# Allegro board olaftry2.brd
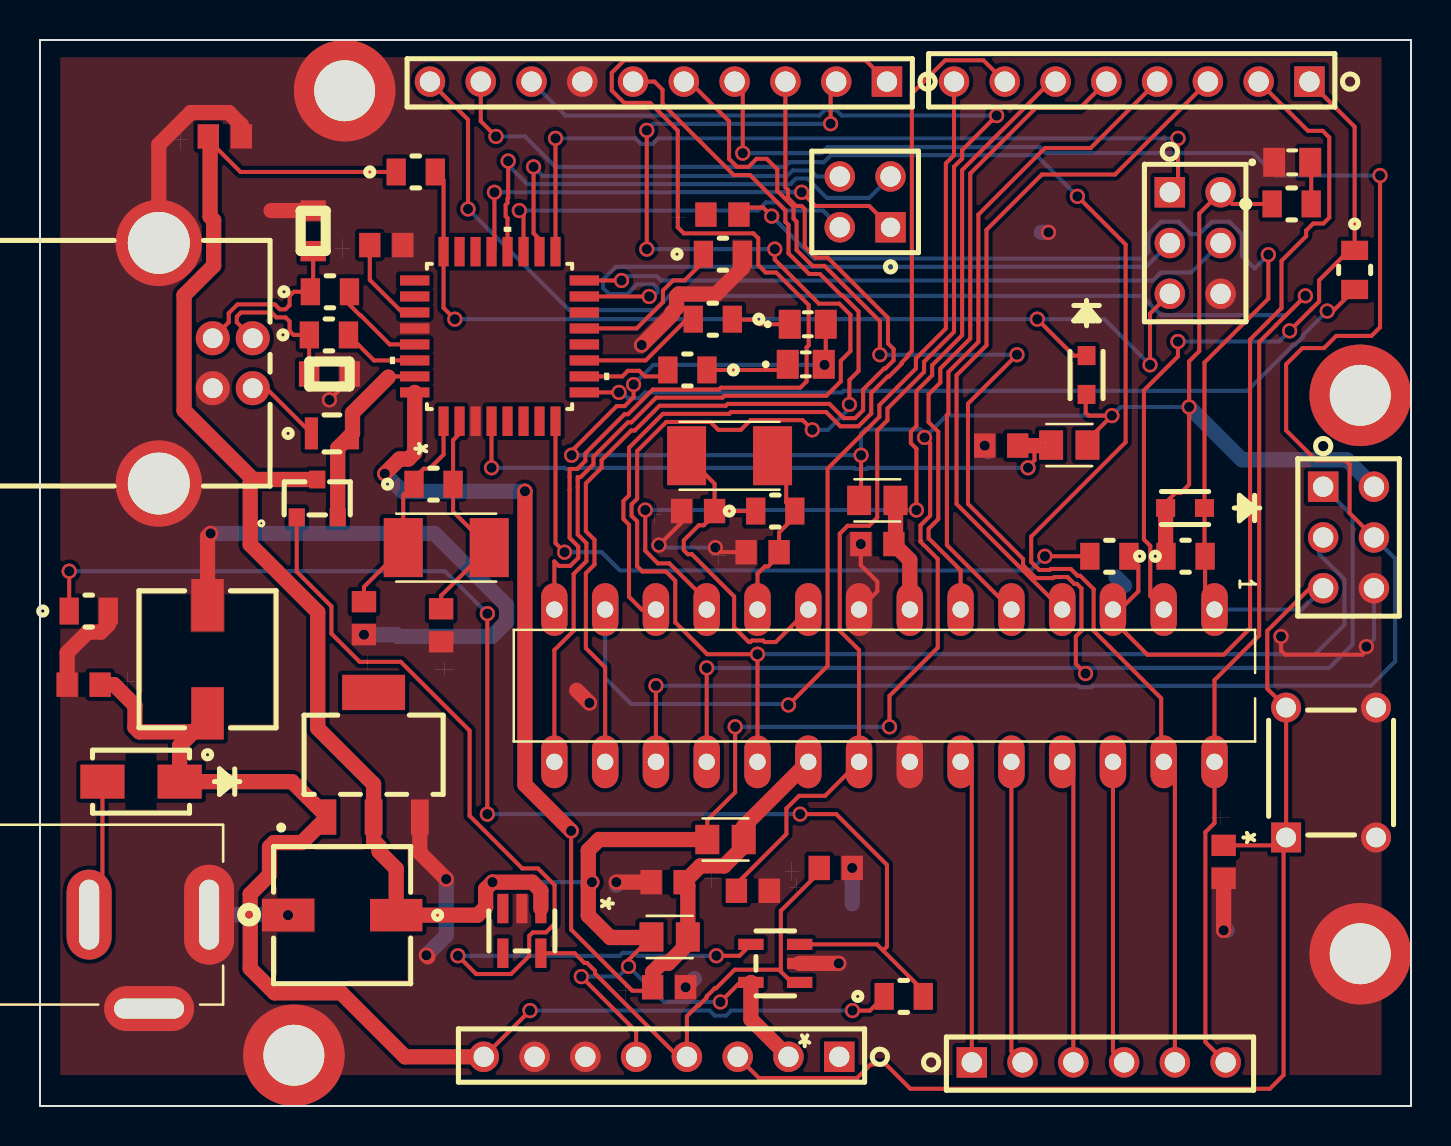
[diagram p0: board, top side]
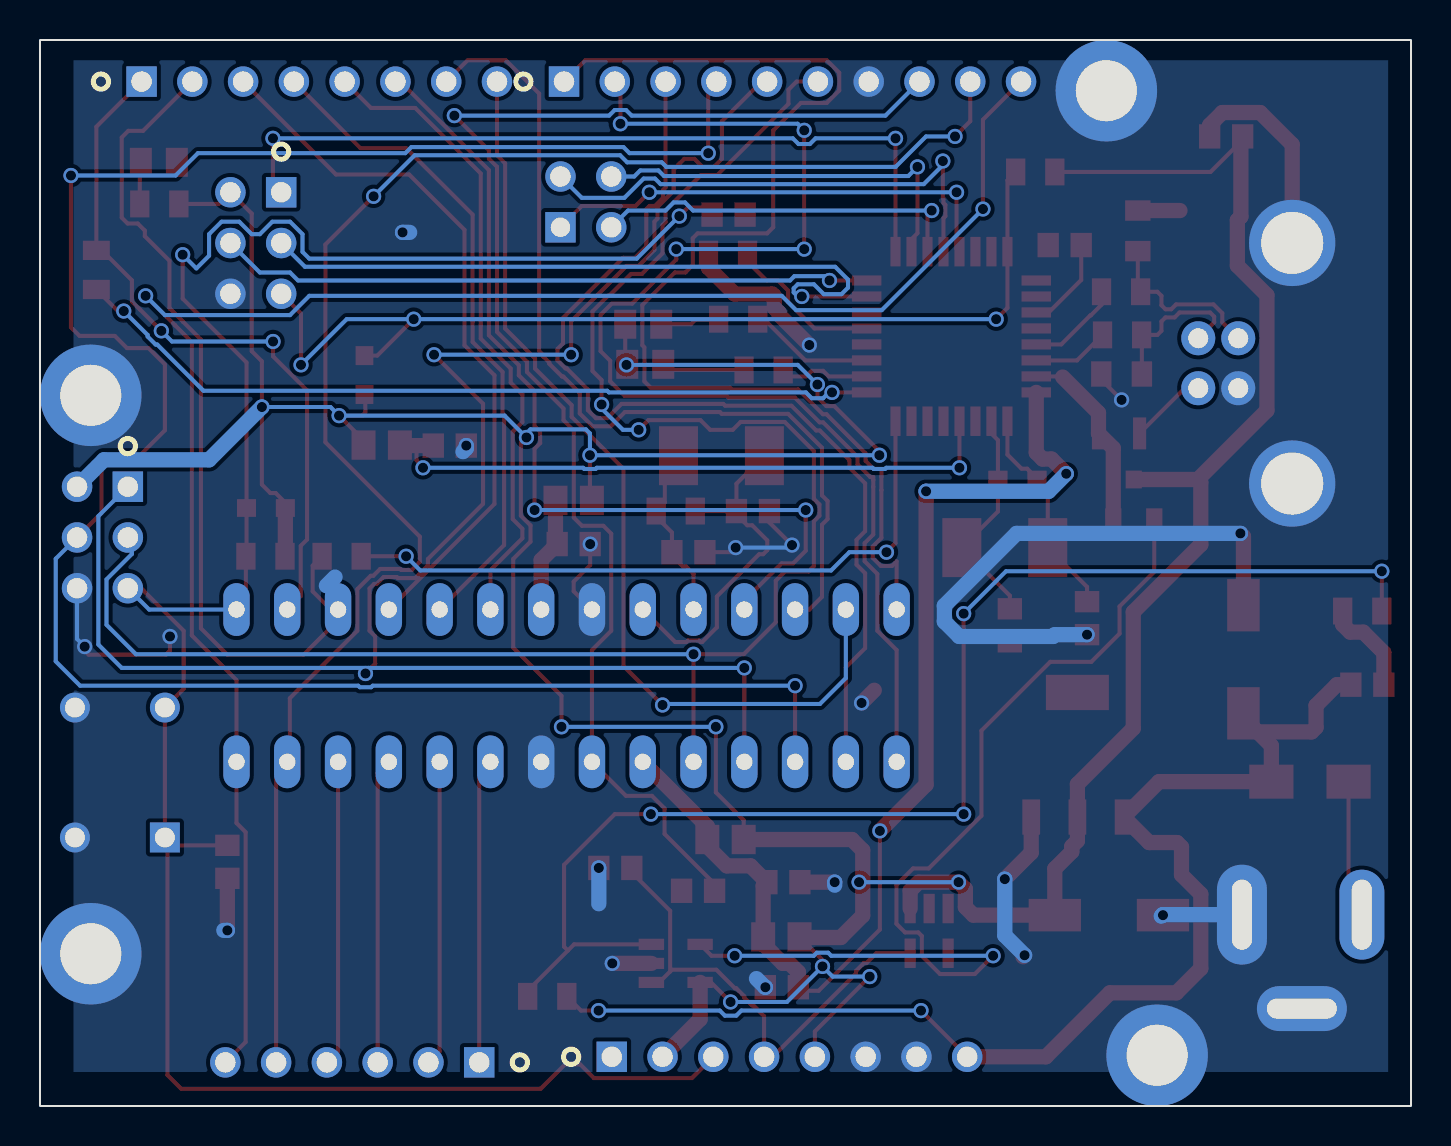
[diagram p1: board, bottom side, seen from below]

Outline 68.58 x 53.34 mm; copper layers: TOP, BOTTOM. Coordinates in mm from the lower left corner of the outline.
Outline path: rectangle 0,0 68.58,53.34

## Design rules (mm)
constraint set DEFAULT: min track width 0.203, pair gap 0.203
net group DP1: nets USB_D+ USB_D-
nets with their own width: min track width 0.762; nets 5V_AVCC 5V_VCC 5V_VCC1 +5V GND USBVCC VIN

## Placement (name value [footprint] x y rotation side)
C1  22pF  [CC0805N]  16.21 24.41 90 top
C2  22pF  [CC0805N]  20.07 24.05 90 top
C3  100nF  [CC0805N]  48.08 33.05 180 top
C4  100nF  [CC0805N]  34.14 44.6 0 top
C5  100nF  [CC0805N]  31.47 5.94 0 top
C6  100uF  [U2-K]  8.38 22.35 90 top
C7  100uF  [U2-K]  15.11 9.55 180 top
C8  100nF  [CC0805N]  9.25 48.51 0 top
C9  100nF  [CC0805N]  2.18 21.08 180 top
C10  1uF  [CC0805N]  17.32 43.08 0 top
C12  2.2uF  [CC0805N]  39.8 11.91 0 top
C13  100nF  [CC0805N]  59.21 12.22 270 top
C14  22pF  [CC0805N]  36.14 27.71 0 top
C15  22pF  [CC0805N]  32.92 29.77 0 top
C16  100nF  [CC0805N]  41.88 28.12 180 top
C17  100nF  [CC0805N]  31.39 11.2 180 top
C18  100nF  [CC0805N]  35.66 10.77 180 top
D1  DIODE SCHOTTKY  [SD0805]  52.35 36.58 270 top
D2  DIODE  [SMA]  5.05 16.23 180 top
D3  TxLED  [LED_0805_ORANGE]  38.4 39.12 0 top
D4  RxLED  [LED_0805_ORANGE]  38.3 37.11 0 top
D5  DIODE SCHOTTKY  [SD0805]  57.28 29.92 180 top
D6  PWR LED  [LEDC2012X70N]  62.64 47.22 0 top
J1  JUMPER  [HEADERV_4POS_2X2]  42.55 43.97 0 top
J2  POWER  [CONN8_FH]  39.98 2.46 0 top
J3  ICSP1  [HDRV6POS254_2X3]  56.52 45.72 270 top
J4  +12V DC  [CUI_PJ-002AH]  8.46 9.58 180 top
J5  USB_B  [CON4-B474X618RZT]  10.64 35.92 270 top
J6  3.3V LP2985  [DBV5]  24.1 8.76 270 top
J7  HEADER 10  [CONN10_FH]  42.37 51.26 0 top
J8  ICSP  [HDRV6POS254_2X3]  64.19 30.99 270 top
J9  HEADER 6  [CONN6_FH]  46.61 2.18 180 top
J10  HEADER 8  [CONN8_FH]  63.5 51.26 0 top
L1  BEAD  [BEADC2112X105N]  51.49 33.07 180 top
L2  BEAD  [BEADC2112X105N]  34.29 13.34 0 top
L3  2.2uH  [IND_2016]  14.61 33.66 0 top
L4  BEAD  [BEADC2112X105N]  41.88 30.3 0 top
L5  BEAD  [BEADC2112X105N]  31.5 8.46 0 top
MH1  M_HOLE  [MH_120]  12.7 2.54 0 top
MH2  M_HOLE  [MH_120]  66.04 7.62 0 top
MH3  M_HOLE  [MH_120]  15.24 50.8 0 top
MH4  M_HOLE  [MH_120]  66.04 35.56 0 top
Q1  MOSFET N  [SOT-23]  13.87 30.4 0 top
R1  10k  [STA_RMCF0805]  18.8 46.74 0 top
R2  1Meg  [STA_RMCF0805]  19.68 31.11 0 top
R3  1k  [STA_RMCF0805]  34.16 42.62 0 top
R4  22Ohm  [STA_RMCF0805]  14.45 38.58 0 top
R5  22Ohm  [STA_RMCF0805]  14.5 40.74 0 top
R6  1k  [STA_RMCF0805]  33.66 39.37 180 top
R7  1k  [STA_RMCF0805]  32.38 36.83 180 top
R8  1k  [STA_RMCF0805]  65.76 41.83 270 top
R9  1k  [STA_RMCF0805]  53.49 27.51 180 top
R10  10k  [STA_RMCF0805]  57.3 27.51 0 top
R11  1Meg  [STA_RMCF0805]  36.78 29.77 0 top
R12  10k  [STA_RMCF0805]  43.21 5.49 0 top
R13  10k  [STA_RMCF0805]  2.44 24.77 0 top
R14  1k  [STA_RMCF0805]  62.61 45.14 0 top
RV1  VARISTOR  [VARISTOR_0805]  14.48 36.63 0 top
RV2  VARISTOR  [VARISTOR_0805]  13.67 43.79 90 top
SW1  SW DPST  [SW4_1825910-B]  62.33 13.44 90 top
U1  ATMEGA16U2-MUR  [32A]  22.99 38.51 90 top
U2  LM7805/TO  [DCY4]  16.69 17.58 0 top
U3  ATMEGA328P-PN  [DIPDIL28]  58.75 24.84 270 top
U4  LM321/TO  [MF05A]  36.78 7.14 180 top
Y1  16 MHz  [XTAL500X320X130N]  20.32 27.94 180 top
Y2  16 MHz  [XTAL500X320X130N]  34.49 32.54 180 top

## Library data of the parts
C1 C2 C14 C15 = CAP NP: User Part Number: C0805C220K5GACTU; Tolerance: TOL
C3-C5 C8 C9 C13 C16-C18 = CAP NP: User Part Number: C0805C104K3RACTU; Tolerance: TOL
C6 C7 = CAP: User Part Number: EDH107M025A9HAA; Tolerance: TOL
C10 = CAP NP: User Part Number: C0805C105K3PACTU; Tolerance: TOL
C12 = CAP NP: User Part Number: C0805C225K4RACTU; Tolerance: TOL
D1 D5 = DIODE SCHOTTKY: User Part Number: SD0805S040S0R5; Tolerance: TOL
D2 = DIODE: User Part Number: PN; Tolerance: TOL
D3 D4 D6 = LED
J1 = HEADER 4_1: User Part Number: PN; Tolerance: TOL
J2 = HEADER 8
J3 J8 = HEADER 6_0: User Part Number: PN; Tolerance: TOL
J4 = CONN JACK PWR
J5 = HEADER 4_3
J6 = HEADER 5_2: User Part Number: PN; Tolerance: TOL
J7 = HEADER 10_0
J9 = HEADER 6_1
J10 = HEADER 8_0
L1 L2 L4 L5 = BEAD
L3 = INDUCTOR: User Part Number: PN; Tolerance: TOL
MH1-MH4 = M_HOLE
Q1 = MOSFET N_1: User Part Number: PN; Tolerance: TOL
R1 R3-R10 R12-R14 = RESISTOR: User Part Number: PN; Tolerance: TOL
R2 R11 = RESISTOR: User Part Number: RMCF0805JT1M00; Tolerance: TOL
RV1 RV2 = VARISTOR: User Part Number: PN; Tolerance: TOL
SW1 = SW DPST: User Part Number: PN; Tolerance: TOL
U1 = ATMEGA16U2-MUR_7: Tolerance: TOL
U2 = LM7805/TO_1: User Part Number: PN; Tolerance: TOL
U3 = ATMEGA328P-PN_4
U4 = LM321/TO_0: User Part Number: PN; Tolerance: TOL
Y1 Y2 = CRYSTAL

## Footprints (pads in the part's own frame, mm; a bottom-side part is the same pattern mirrored in y, then rotated)
32A
  rect 1.473x0.508 smd: 1(-4.242,2.8) 2(-4.242,2) 3(-4.242,1.2) 4(-4.242,0.4) 5(-4.242,-0.4) 6(-4.242,-1.2) 7(-4.242,-2) 8(-4.242,-2.8) 17(4.242,-2.8) 18(4.242,-2) 19(4.242,-1.2) 20(4.242,-0.4) 21(4.242,0.4) 22(4.242,1.2) 23(4.242,2) 24(4.242,2.8)
  rect 0.508x1.473 smd: 9(-2.8,-4.242) 10(-2,-4.242) 11(-1.2,-4.242) 12(-0.4,-4.242) 13(0.4,-4.242) 14(1.2,-4.242) 15(2,-4.242) 16(2.8,-4.242) 25(2.8,4.242) 26(2,4.242) 27(1.2,4.242) 28(0.4,4.242) 29(-0.4,4.242) 30(-1.2,4.242) 31(-2,4.242) 32(-2.8,4.242)
BEADC2112X105N
  rect 1.2x1.47 smd: 1(-0.91,0) 2(0.91,0)
CC0805N
  rect 1.067x1.219 smd: 1(-0.826,0) 2(0.826,0)
CON4-B474X618RZT
  round 1.702 hole 0.991: 1(0,0) 2(-2.5,0) 3(-2.5,-2) 4(0,-2)
  round 4.318 hole 3.099: 5(-7.27,-4.699) 6(4.77,-4.699)
CONN6_FH
  rect 1.524x1.524 hole 1.016: 1(0,0)
  round 1.524 hole 1.016: 2(-2.54,0) 3(-5.08,0) 4(-7.62,0) 5(-10.16,0) 6(-12.7,0)
CONN8_FH
  rect 1.524x1.524 hole 1.016: 1(0,0)
  round 1.524 hole 1.016: 2(-2.54,0) 3(-5.08,0) 4(-7.62,0) 5(-10.16,0) 6(-12.7,0) 7(-15.24,0) 8(-17.78,0)
CONN10_FH
  rect 1.524x1.524 hole 1.016: 1(0,0)
  round 1.524 hole 1.016: 2(-2.54,0) 3(-5.08,0) 4(-7.62,0) 5(-10.16,0) 6(-12.7,0) 7(-15.24,0) 8(-17.78,0) 9(-20.32,0) 10(-22.86,0)
CUI_PJ-002AH
  oval 2.5x5 hole 1x3.5: 1(0,0)
  oval 2.25x4.5 hole 1x3.5: 2(6,0)
  oval 4.5x2.25 hole 3.5x1: 3(3,4.7)
DBV5
  rect 1.473x0.559 smd: 1(-1.118,0.95) 2(-1.118,0) 3(-1.118,-0.95) 4(1.118,-0.95) 5(1.118,0.95)
DCY4
  rect 3.15x1.765 smd: (0,3.118)
  rect 0.889x1.765 smd: 1(-2.311,-3.118) 2(0,-3.118) 3(2.311,-3.118)
DIPDIL28
  oval 2.642x1.321 hole 0.813: 1(0,0) 2(0,-2.54) 3(0,-5.08) 4(0,-7.62) 5(0,-10.16) 6(0,-12.7) 7(0,-15.24) 8(0,-17.78) 9(0,-20.32) 10(0,-22.86) 11(0,-25.4) 12(0,-27.94) 13(0,-30.48) 14(0,-33.02) 15(7.62,-33.02) 16(7.62,-30.48) 17(7.62,-27.94) 18(7.62,-25.4) 19(7.62,-22.86) 20(7.62,-20.32) 21(7.62,-17.78) 22(7.62,-15.24) 23(7.62,-12.7) 24(7.62,-10.16) 25(7.62,-7.62) 26(7.62,-5.08) 27(7.62,-2.54) 28(7.62,0)
HDRV6POS254_2X3
  rect 1.524x1.524 hole 1.016: 1(0,0)
  round 1.524 hole 1.016: 2(0,2.54) 3(2.54,0) 4(2.54,2.54) 5(5.08,0) 6(5.08,2.54)
HEADERV_4POS_2X2
  rect 1.524x1.524 hole 0.965: 1(0,0)
  round 1.524 hole 1.016: 2(-2.54,0) 3(0,2.54) 4(-2.54,2.54)
IND_2016
  rect 0.656x1.6 smd: 1(-1.028,0) 2(1.028,0)
LED_0805_ORANGE
  rect 1.1x1.45 smd: 1(-0.9,0) 2(0.9,0)
LEDC2012X70N
  rect 1.1x1.45 smd: 1(-0.9,0) 2(0.9,0)
MF05A
  rect 1.27x0.559 smd: 1(-1.219,0.953) 2(-1.219,0) 3(-1.219,-0.953) 4(1.219,-0.953) 5(1.219,0.953)
MH_120
  round 5.08 hole 3.048: 1(0,0)
SD0805
  rect 0.953x0.889 smd: 1(-0.972,0) 2(0.972,0)
SMA
  rect 2.21x1.702 smd: 1(-1.93,0) 2(1.93,0)
SOT-23
  rect 0.813x0.889 smd: 1(-1.025,-0.945) 2(1.025,-0.945) 3(0,0.945)
STA_RMCF0805
  rect 0.965x1.346 smd: 1(-0.978,0) 2(0.978,0)
SW4_1825910-B
  rect 1.499x1.499 hole 0.991: 1(0,0)
  round 1.499 hole 0.991: 2(6.5,0) 3(0,-4.5) 4(6.5,-4.5)
U2-K
  rect 2.616x1.626 smd: 1(-2.705,0) 2(2.705,0)
VARISTOR_0805
  rect 1.02x1.27 smd: 1(-1.015,0) 2(1.015,0)
XTAL500X320X130N
  rect 1.95x2.95 smd: 1(-2.15,0) 2(2.15,0)

## Nets
5V_AVCC: C5.1 C17.1 L2.2 L5.2 U1.32 U3.20
5V_VCC: C16.1 L4.2 U3.7(VCC)
5V_VCC1: C3.1 L1.2 U1.4
+3.3V: C12.1 J2.4 J6.5(VOUT) U4.1
+5V: C7.1 C8.1 D1.2(CATHODE) D3.2 D4.2 D5.2(CATHODE) J2.2 J2.5 J3.2 J6.1 J8.2 L1.1 L2.1 L4.1 L5.1 Q1.3 R1.1 R10.1 R14.1 U2.2(VOUT) U4.5(VCC)
GND: C1.1 C2.1 C3.2 C5.2 C6.2 C7.2 C8.2 C9.2 C10.2 C12.2 C13.2 C14.1 C15.1 C16.2 C17.2 C18.1 D6.1(CATHODE) J2.6 J2.7 J3.6 J4.1 J4.3 J5.4 J5.5 J5.6 J6.2 J7.7 J8.6 R3.2 R13.2 RV1.2 RV2.2 SW1.3 SW1.4(NO2) U1.3 U1.28 U2.3 U3.8 U3.22 U4.2
VIN: C6.1 C9.1 D2.1(K) J2.8 R12.1 U2.1
AD0: J9.1 U3.23
AD1: J9.2 U3.24
AD2: J9.3 U3.25
AD3: J9.4 U3.26
AD4: J7.9 J9.5 U3.27
AD5: J7.10 J9.6 U3.28
AREF: C18.2 J7.8 U3.21
D0/RX: J10.1 R8.1 U3.2
D1/TX: J10.2 R9.1 U3.3
D2: J10.3 U3.4
D3: J10.4 U3.5
D4: J10.5 U3.6
D5: J10.6 U3.11
D6: J10.7 U3.12
D7: J10.8 U3.13
D8: J7.1 U3.14
D9: J7.2 U3.15
MISO: J7.5 J8.1 U3.18
MISO1: J3.1 U1.17
MOSI: J7.4 J8.4 U3.17
MOSI1: J3.4 U1.16
PB4: J1.4 U1.18
PB5: J1.2 U1.19
PB6: J1.3 U1.20
PB7: J1.1 U1.21
RESET: C4.2 C13.1 D5.1 J2.3 J8.5 R10.2 SW1.1 SW1.2 U3.1
RESET1: D1.1 J3.5 R1.2 U1.24
SCK: J7.6 J8.3 U3.19
SCK1: J3.3 U1.15
SS: J7.3 U3.16
SS1: U1.14
USB_D+: J5.3 R5.1 RV2.1
USB_D-: J5.2 R4.1 RV1.1
USBVCC: L3.2 Q1.2(SOURCE) U1.31
X1_1: C1.2 R2.1 U1.1(XTAL1) Y1.2
X1_2: C2.2 R2.2 U1.2 Y1.1
N05673: R5.2 U1.29
N05679: R4.2 U1.30
N06312: C10.1 U1.27
N08810: C15.2 R11.1 U3.9 Y2.2
N08902: C14.2 R11.2 U3.10 Y2.1
N09327: R6.2 U1.11
N09393: R7.2 U1.10
N09409: D3.1(CATHODE) R6.1
N09411: D4.1(CATHODE) R7.1
N09469: R8.2 U1.9
N09481: R9.2 U1.8
N12906: C4.1 R3.1 U1.13
N15968: D2.2 J4.2
N19205: J6.3
N20833: Q1.1 U4.4
N21024: R12.2 R13.1 U4.3
N21846: D6.2 R14.2
N47345: J5.1(VCC) L3.1

Pads without a net: J2 1; J6 4; MH1 1; MH2 1; MH3 1; MH4 1; U1 5 6 7 12 22 23 25 26

## Via types
v1: diameter 0.762, hole 0.508, TOP to BOTTOM, 89 vias

## Routing (per net, layer and track width the routed paths; a pad name or vN(x,y) marks a point on that pad's centre or on a via; arc(x,y) is an arc through that point)
5V_AVCC: length 56.2
  TOP w0.203: C5.1 30.47,5.77 29.63,5.77 26.57,8.83 v1(26.57,13.77)
  TOP w0.762: v1(24.26,30.76) 24.26,16.08 v1(26.57,13.77) ; v1(17.25,31.64) 17.98,32.37 18.43,32.37 18.75,32.69 U1.32 ; C5.1 30.65,6.7 31.09,7.14 31.43,7.14 32.41,8.12 L5.2 32.41,11.02 C17.1 33.03,12.02 34.22,12.02 35.2,12.99 L2.2 35.2,13.99 U3.20
  BOTTOM w0.762: v1(24.26,30.76) 18.12,30.76 v1(17.25,31.64)
5V_VCC: length 5.8
  TOP w0.762: L4.2 42.79,28.2 C16.1 43.51,27.32 U3.7
5V_VCC1: length 32.2
  TOP w0.203: v1(49.42,31.93) 49.42,31.99 49.75,32.31 49.75,33.05 ; U1.4 v1(22.59,31.93)
  TOP w0.762: C3.1 50.55,33.05 L1.2
  BOTTOM w0.203: v1(22.59,31.93) 26.25,31.93 26.31,31.88 26.88,31.88 26.94,31.93 40.73,31.93 40.79,31.88 41.36,31.88 41.41,31.93 v1(49.42,31.93)
+3.3V: length 24.4
  TOP w0.203: U4.1 37.61,6.18 37.06,6.73 ; 37.06,6.73 36.97,6.82 34.75,6.82 33.82,5.89 33.75,5.89 33.35,5.49 33.35,5.42 32.96,5.03 32.89,5.03 32.36,4.5 J2.4 31.93,2.46 27.76,6.63 27.76,6.76 27.36,7.16 27.23,7.16 26.75,7.65 J6.5 ; 37.06,6.73 37.06,9.77 38.98,11.68 C12.1
+5V: length 226.9
  TOP w0.203: J2.5 29.82,3.73 v1(27.08,6.48) ; v1(44.25,33.45) 44.53,33.17 44.53,29.54 44.04,29.05 44.04,28.24 44.91,27.37 44.91,22.94 42.49,20.52 v1(42.49,18.97) ; v1(27.61,11.2) 27.61,11.18 27.43,11 ; U4.5 35.01,6.18 v1(34.04,5.21) ; 30.56,8.43 29.44,7.31 v1(29.44,6.99) ; D5.2 56.31,30.19 56.79,30.67 57.05,30.67 57.48,31.1 v1(57.48,34.98) 57.48,37.26 57.99,37.77 57.99,44.65 J3.2 59.64,45.14 R14.1 ; D3.2 39.3,37.21 D4.2 39.23,37.08 v1(39.24,37.08) ; C8.1 8.42,48.34 10.03,46.74 R1.1 ; L2.1 33.38,14.3 34.77,15.7 v1(34.77,18.97) ; L1.1 52.4,33.32 v1(53.62,34.54) 52.45,34.54 52.31,34.69 52.31,35.56 D1.2 ; v1(41.07,32.56) 41.07,30.4 L4.1 ; v1(26.59,32.56) 26.59,32.77 28.85,35.02 29.25,35.02 29.69,35.47 v1(29.69,36.1)
  TOP w0.762: J6.1 25.05,10.77 24.63,11.2 v1(22.63,11.2) 22.29,10.86 22.29,9.95 21.89,9.55 C7.1 17.82,11.87 16.97,12.73 16.97,12.99 16.69,13.27 U2.2 16.69,16.1 13.89,18.9 13.89,24.71 10.52,28.09 10.52,31.2 10.66,31.35 ; 10.66,31.35 7.21,34.8 7.21,40.57 8.69,42.05 8.69,44.32 8.51,44.5 8.51,48.43 C8.1 ; 10.66,31.35 Q1.3 ; J2.2 35.56,4.34 U4.5 ; L5.1 30.56,8.43 28.52,8.43 27.43,9.53 27.43,12.8 27.97,13.34 L2.1 ; D5.2 56.31,27.53 R10.1
  BOTTOM w0.203: v1(57.48,34.98) 54.05,34.98 v1(53.62,34.54) 45.34,34.54 v1(44.25,33.45) 44.25,33.66 44.04,33.86 41.27,33.86 41.07,33.66 v1(41.07,32.56) v1(26.59,32.56) ; v1(22.63,11.2) v1(27.61,11.2) ; v1(39.24,37.08) 30.68,37.08 v1(29.69,36.1) ; v1(34.77,18.97) v1(42.49,18.97) ; v1(34.04,5.21) 31.22,5.21 v1(29.44,6.99) 28.93,6.48 v1(27.08,6.48)
  BOTTOM w0.762: J8.2 65.38,32.33 60.12,32.33 v1(57.48,34.98)
GND: length 97.8
  TOP w0.203: v1(41.06,28.12) 41.06,27.06 41.88,26.24 41.88,25.76 U3.8 ; C14.1 34.01,27.71 v1(33.78,27.94) ; v1(62.08,23.5) 62.08,22.78 62.28,22.58 66.14,22.58 66.34,22.78 v1(66.34,22.99) ; RV1.2 15.49,36.35 v1(14.48,35.33) ; C15.1 32.09,29.2 v1(30.96,28.07)
  TOP w0.762: C17.2 v1(28.83,11.2) ; U2.3 19,12.67 v1(20.32,11.35) ; RV2.2 11.56,44.8 ; J5.5 5.94,48.11 7.54,49.71 9.44,49.71 10.07,49.08 C8.2 ; R13.2 3.42,24.09 3.04,23.71 2.39,23.71 1.36,22.68 C9.2 ; v1(30.1,38.08) 31.61,39.59 31.61,39.7 31.84,39.94 31.84,40.52 31.95,40.63 33.83,40.63 35.14,41.94 R3.2 ; v1(8.53,28.65) 8.38,28.5 C6.2 ; v1(19.33,7.54) 19.41,7.47 ; v1(27.48,20.17) 26.85,20.8 ; C13.2 v1(59.21,8.79) ; U4.2 v1(39.95,7.14)
  BOTTOM w0.203: J8.6 66.73,23.37 v1(66.34,22.99) ; v1(62.08,23.5) 61.98,23.5 ; v1(33.78,27.94) 31.09,27.94 v1(30.96,28.07)
  BOTTOM w0.762: v1(32.3,5.94) 32.31,5.94 32.74,6.38 ; v1(28.83,11.2) 28.83,11.05 ; 12.45,9.55 12.42,9.58 J4.1 ; 12.45,9.55 12.5,9.5 ; 12.45,9.55 v1(12.41,9.55) ; v1(16.21,23.58) 17.82,23.58 17.91,23.5 22.6,23.5 23.34,24.24 23.34,25.04 19.73,28.65 v1(8.53,28.65) ; v1(40.63,11.91) 40.63,10.12 ; v1(20.32,11.35) 20.32,8.53 v1(19.33,7.54) ; v1(59.21,8.79) 59.39,8.79 ; v1(47.26,33.05) 47.26,32.91 47.42,32.74 ; v1(50.44,43.71) 50.09,43.71 ; 54.25,26.04 53.82,26.47
VIN: length 63.4
  TOP w0.203: v1(40.64,4.78) 41.52,4.78 R12.1 ; J2.8 v1(24.51,4.78)
  TOP w0.762: 7.68,18.72 6.99,18.03 D2.1 12.6,16.23 U2.1 13.1,13.18 11.7,13.18 11.48,12.96 11.48,11.57 10.52,10.61 10.52,6.88 11.73,5.66 15.06,5.66 18.26,2.46 J2.8 ; 7.68,18.72 8.38,19.43 C6.1 ; 7.68,18.72 4.97,18.72 4.75,18.94 4.75,20.04 3.71,21.08 C9.1
  BOTTOM w0.203: v1(40.64,4.78) 34.57,4.78 34.32,4.52 33.75,4.52 33.5,4.78 v1(24.51,4.78)
AD0: length 15.3
  TOP w0.203: J9.1 46.61,16.66 U3.23
AD1: length 15.3
  TOP w0.203: J9.2 48.59,2.74 U3.24
AD2: length 15.3
  TOP w0.203: J9.3 51.69,16.66 U3.25
AD3: length 15.3
  TOP w0.203: J9.4 53.67,2.74 U3.26
AD4: length 84.2
  TOP w0.203: J7.9 22.05,49.28 v1(22.81,48.51) ; 56.77,2.18 56.77,16.66 U3.27 56.08,17.35 56.08,20.4 52.7,23.78 52.7,25.86 52.04,26.53 51.91,26.53 51.56,26.87 50.56,26.87 50.51,26.82 49.98,26.82 49.58,27.22 49.58,28.49 54.31,33.21 54.31,43.1 v1(51.89,45.52)
  BOTTOM w0.203: v1(51.89,45.52) 49.83,47.57 39.56,47.57 39.21,47.22 37.48,47.22 37.25,46.99 25.78,46.99 24.26,48.51 v1(22.81,48.51)
AD5: length 93.1
  TOP w0.203: v1(21.41,44.88) 21.41,49.35 J7.10 ; v1(63.3,40.54) 62.23,39.47 62.23,39.47 61.82,39.07 61.82,39.07 60.99,38.23 60.99,23.55 58.75,21.31 U3.28 58.75,14.16 58.29,13.7 58.29,3.2 J9.6
  BOTTOM w0.203: v1(63.3,40.54) 62.33,39.57 56.07,39.57 55.11,40.54 31.48,40.54 30.76,39.82 26.47,39.82 v1(21.41,44.88)
AREF: length 70.6
  TOP w0.203: v1(47.85,49.56) 46.13,47.83 46.13,47.4 45.72,47 45.72,38.73 44.22,37.24 44.22,36.73 42.39,34.9 42.39,34.31 41.88,33.8 41.88,29.44 41.47,29.03 40.4,29.03 40.01,28.64 40.01,23.78 40.97,22.82 U3.21 39.27,15.52 37.97,15.52 37.34,14.89 37.34,13.61 34.84,11.11 C18.2
  BOTTOM w0.203: J7.8 26.29,49.56 38.98,49.56 39.26,49.83 39.83,49.83 40.11,49.56 v1(47.85,49.56)
D0/RX: length 35.3
  TOP w0.203: U3.2 55.54,25.51 55.54,28.03 55.22,28.35 55.22,35.81 56.92,37.51 v1(56.92,38.25) ; v1(62.51,38.79) 63.58,39.85 63.58,39.85 63.98,40.25 63.98,41.32 65.48,42.81 R8.1 65.76,49 J10.1
  BOTTOM w0.203: v1(56.92,38.25) 61.98,38.25 v1(62.51,38.79)
D1/TX: length 43.4
  TOP w0.203: R9.1 54.94,27.04 54.94,25.75 54.03,24.84 U3.3 53.67,24.31 55.4,22.58 59.21,22.58 60.53,23.9 60.53,38.34 61.42,39.23 61.42,39.24 62.06,39.88 62.06,39.88 62.1,39.92 62.1,42.29 63.33,43.52 63.33,43.8 63.69,44.16 64.2,44.16 64.49,44.45 64.49,48.46 64.16,48.79 63.42,48.79 J10.2
D2: length 36
  TOP w0.203: J10.3 53.77,46.61 50.11,46.61 47.35,43.84 47.35,39.41 47.35,38.06 45.85,36.56 45.85,30.12 U3.4
D3: length 33.4
  TOP w0.203: J10.4 52.55,47.93 50.27,47.93 46.94,44.6 46.94,39.24 46.94,38.23 45.44,36.73 45.44,34.65 45.36,34.57 45.36,28.07 U3.5
D4: length 32.5
  TOP w0.203: J10.5 52.02,49.94 49.81,49.94 46.53,46.66 46.53,39.07 46.53,39.07 46.53,38.4 45.03,36.9 45.03,36.2 44.45,35.61 44.45,34.22 44.93,33.74 44.93,29.37 44.45,28.88 44.45,28.41 46.05,26.81 U3.6
D5: length 44.8
  TOP w0.203: J10.6 50.56,51.26 46.13,46.83 46.13,38.57 44.63,37.07 44.63,36.56 43.84,35.77 43.84,34.02 43.56,33.74 43.56,33.17 43.84,32.89 v1(43.84,29.82) ; U3.11 33.35,25.28 31.48,27.15 30.91,27.15 30.28,27.78 v1(30.28,29.82)
  BOTTOM w0.203: v1(30.28,29.82) v1(43.84,29.82)
D6: length 45.4
  TOP w0.203: U3.12 30.1,24.84 29.46,25.48 29.46,29.09 29.18,29.37 29.18,30.27 29.46,30.55 29.46,32.94 31.16,34.63 34.48,34.63 34.57,34.72 39.32,34.72 40.03,34.01 40.94,34.01 41.58,34.65 41.58,35.68 42.4,36.5 42.46,36.5 43.1,37.14 43.1,37.2 43.41,37.51 43.41,37.57 43.61,37.78 43.61,50.66 45.28,52.32 47.19,52.32 J10.7
D7: length 47.8
  TOP w0.203: v1(37.44,20.07) 39.4,22.02 39.4,31.89 41.99,34.48 41.99,35.07 43.81,36.9 43.81,37.4 45.31,38.9 45.31,47.17 45.72,47.57 J10.8
  BOTTOM w0.203: U3.13 28.27,21.41 29.57,20.12 37.39,20.12 v1(37.44,20.07)
D8: length 59.5
  TOP w0.203: J7.1 41.3,52.32 29.23,52.32 28.6,51.7 28.6,50.82 29.23,50.19 30.52,50.19 31.9,48.81 31.9,43.97 32.21,43.66 35.69,43.66 35.93,43.42 35.93,42.08 36.3,41.71 36.82,41.71 38.45,40.08 38.45,38.06 38.35,37.96 38.35,36.26 38.03,35.94 34.06,35.94 33.97,35.85 30.65,35.85 29.41,34.61 29.24,34.61 27.28,32.65 27.28,32.28 26.88,31.88 26.5,31.88 26.49,31.87 26.49,31.49 26.49,31.49 26.49,30.82 26.49,28.43 26.92,28 26.92,27.43 26.52,27.03 25.95,27.03 25.73,27.25 U3.14
D9: length 63.3
  TOP w0.203: U3.15 25.73,22.82 26.7,23.78 26.7,26.62 27.33,27.26 27.33,28.16 26.9,28.6 26.9,30.99 26.9,31.47 27.05,31.47 27.69,32.11 27.69,32.49 29.41,34.21 29.58,34.21 30.82,35.45 34.14,35.45 34.23,35.54 39.34,35.54 40.06,36.26 40.06,37.29 40.54,37.77 40.54,39.59 39.98,40.15 38.96,40.15 36.75,42.35 v1(36.75,42.88) ; J7.2 39.55,50.98 v1(39.55,49.15) ; v1(30.35,42.88) v1(30.35,48.82)
  BOTTOM w0.203: v1(36.75,42.88) v1(30.35,42.88) ; v1(30.35,48.82) 30.68,49.15 v1(39.55,49.15)
MISO: length 93.6
  TOP w0.203: v1(52.3,21.64) 51.81,22.13 51.81,23.5 52.1,23.78 52.1,25.9 51.87,26.12 51.74,26.12 51.39,26.47 50.73,26.47 50.68,26.42 49.81,26.42 49.17,27.06 49.17,27.37 46.42,30.13 46.42,35.14 v1(48.87,37.59) ; v1(42.01,37.59) 42.01,39.27 39.24,42.04 38.64,42.04 37.85,42.83 37.85,44.25 37.69,44.4 37.69,44.98 36.88,45.79 36.88,46.86 36.35,47.39 35.84,47.39 35.44,46.99 34.87,46.99 34.47,47.39 34.47,49.28 32.49,51.26 J7.5 ; U3.18 v1(33.35,21.92)
  BOTTOM w0.203: v1(52.3,21.64) 52.3,21.77 52.15,21.92 ; J8.1 65.66,29.51 65.66,23.09 64.49,21.92 52.15,21.92 ; 52.15,21.92 v1(33.35,21.92) ; v1(42.01,37.59) v1(48.87,37.59)
MISO1: length 39.9
  TOP w0.203: v1(56.93,48.42) 56.93,46.13 J3.1 ; U1.17 v1(25.79,48.42)
  BOTTOM w0.203: v1(25.79,48.42) 29.78,48.42 30.07,48.13 30.64,48.13 30.92,48.42 v1(56.93,48.42)
MOSI: length 108.7
  TOP w0.203: v1(35.15,47.68) 35.15,50.85 J7.4 ; J8.4 65.51,29.67 65.51,32.11 65.3,32.31 63.83,32.31 62.33,33.81 62.33,37.11 63.14,37.92 64.23,37.92 64.84,38.53 66.6,38.53 67.03,38.96 v1(67.03,46.56) ; U3.17 v1(30.81,21.03)
  BOTTOM w0.203: v1(30.81,21.03) 51.94,21.03 52.01,20.95 52.58,20.95 52.66,21.03 66.57,21.03 67.79,22.25 67.79,27.38 J8.4 ; v1(35.15,47.68) 39.09,47.68 39.39,47.98 50,47.98 50.31,47.68 60.68,47.68 61.8,46.56 v1(67.03,46.56)
MOSI1: length 32.8
  TOP w0.203: U1.16 v1(29.09,41.31)
  BOTTOM w0.203: J3.4 57.58,41.71 56.07,41.71 55.67,41.31 31.06,41.31 30.84,41.52 29.3,41.52 v1(29.09,41.31)
PB4: length 20.1
  TOP w0.203: U1.18 24.99,43.37 24.69,43.67 v1(24.69,46.99)
  BOTTOM w0.203: v1(24.69,46.99) 25.15,46.53 37.37,46.53 37.65,46.81 38.55,46.81 38.86,46.51 J1.4
PB5: length 18.9
  TOP w0.203: U1.19 24.19,44.6 v1(23.98,44.81)
  BOTTOM w0.203: v1(23.98,44.81) 35.91,44.81 36.32,45.21 36.89,45.21 37.29,44.81 39.17,44.81 J1.2
PB6: length 25.3
  TOP w0.203: v1(23.42,47.28) 23.42,45.44 23.39,45.4 23.39,45.19 23.29,45.09 23.29,44.52 23.39,44.43 U1.20
  BOTTOM w0.203: v1(23.42,47.28) 23.42,47.08 24.37,46.13 37.54,46.13 37.82,46.41 38.38,46.41 39.35,45.44 41.48,45.44 J1.3
PB7: length 23.6
  TOP w0.203: v1(22.73,45.72) 22.73,42.89 U1.21 ; J1.1 41.48,45.03 38.79,45.03 v1(38.1,45.72)
  BOTTOM w0.203: v1(38.1,45.72) v1(22.73,45.72)
RESET: length 114.9
  TOP w0.203: 62.2,13.31 62.2,1.55 61.52,0.86 43.54,0.86 42.32,2.08 41.55,2.08 40.87,1.4 35.97,1.4 J2.3 ; 62.2,13.31 SW1.1 SW1.2 61.39,20.88 61.39,23.78 63.52,25.91 J8.5 ; 62.2,13.31 61.94,13.04 C13.1 ; U3.1 58.28,25.31 R10.2 58.25,27.54 D5.1 58.25,37.2 61.44,40.4 v1(61.44,42.6) ; C4.2 34.96,44.75 35.17,44.96 36.17,44.96 v1(36.6,44.53)
  BOTTOM w0.203: v1(36.6,44.53) 38.73,42.4 55.11,42.4 55.45,42.74 55.45,43.62 56.07,44.25 56.96,44.25 57.58,43.62 57.99,43.62 58.61,44.25 59.5,44.25 60.12,43.62 60.12,42.55 60.76,41.91 v1(61.44,42.6) ; J8.5 63.12,24.84 U3.1
RESET1: length 50.7
  TOP w0.203: J3.5 55.52,39.65 v1(55.52,37.08) ; v1(49.89,39.37) 51.71,37.55 D1.1 ; v1(20.75,39.37) 20.19,39.93 U1.24 20.19,46.32 R1.2
  BOTTOM w0.203: v1(55.52,37.08) 53.24,39.37 v1(49.89,39.37) v1(20.75,39.37)
SCK: length 90.3
  TOP w0.203: v1(38.63,33.83) 38.15,34.32 35.54,34.32 35.06,33.83 33.93,33.83 33.54,34.23 33.43,34.23 31.33,34.23 29.87,32.77 29.87,30.38 29.59,30.1 29.59,29.54 29.87,29.26 29.87,27.01 30.13,26.75 31.31,26.75 31.78,26.28 31.78,24.21 33.38,22.61 v1(35.89,22.61) U3.19 ; v1(40.49,35.1) 40.49,36.32 40.94,36.78 40.94,39.76 40.15,40.55 40.09,40.55 39.01,41.63 38.47,41.63 37.44,42.67 37.44,44.08 37.29,44.24 37.29,44.81 35.51,46.58 34.7,46.58 31.14,50.14 31.14,50.85 30.73,51.26 J7.6
  BOTTOM w0.203: v1(40.49,35.1) 40.49,34.9 39.42,33.83 v1(38.63,33.83) ; J8.3 63.98,28.24 63.98,27.62 65.25,26.35 65.25,24.08 63.78,22.61 v1(35.89,22.61)
SCK1: length 36.6
  TOP w0.203: U1.15 v1(30.47,40.51)
  BOTTOM w0.203: v1(30.47,40.51) 30.68,40.51 30.88,40.71 30.88,40.91 30.68,41.12 29.87,41.12 29.37,40.62 28.49,40.62 28.16,40.94 28.16,41.35 28.8,41.99 55.33,41.99 J3.3
SS: length 50.7
  TOP w0.203: U3.16 28.27,21.95 27.3,22.91 27.3,26.66 27.74,27.09 27.74,28.33 27.3,28.76 27.3,31.15 28.09,31.94 28.09,32.32 29.58,33.8 29.75,33.8 30.99,35.04 34.31,35.04 34.4,35.13 39.49,35.13 40.2,34.42 40.77,34.42 41.17,34.82 41.17,35.85 42.23,36.91 42.3,36.91 42.7,37.31 42.7,37.88 42.42,38.16 42.42,39.43 39.41,42.44 38.81,42.44 38.25,43 38.25,44.88 38.1,45.03 37.82,45.03 37.41,45.44 37.41,45.83 37.29,45.96 J7.3
USB_D+: length 8.7
  TOP w0.203: J5.3 9.44,39.21 9.44,39.67 9.88,40.11 11.75,40.11 11.99,39.87 12.28,39.87 12.48,40.07 12.48,40.54 12.69,40.74 R5.1 13.67,40.88 RV2.1
USB_D-: length 7.8
  TOP w0.203: J5.2 9.85,39.21 9.85,39.5 10.05,39.7 11.58,39.7 11.82,39.46 12.28,39.46 12.48,39.26 12.48,38.79 12.69,38.58 R4.1 13.46,38.57 RV1.1
USBVCC: length 9.4
  TOP w0.203: 17.42,36.47 17.46,36.51 U1.31
  TOP w0.762: 17.42,36.47 15.63,34.68 L3.2 14.89,32.92 Q1.2
X1_1: length 10.8
  TOP w0.203: U1.1 20.19,32.59 19.48,31.89 19.2,31.89 18.71,31.4 R2.1 18.17,30.58 Y1.2 16.21,25.98 C1.2
X1_2: length 11.3
  TOP w0.203: C2.2 20.07,25.54 Y1.1 20.66,29.75 R2.2 20.66,33.32 20.99,33.64 U1.2
N05673: length 4.7
  TOP w0.203: U1.29 17.49,38.11 16.04,39.56 16.01,39.56 15.48,40.09 R5.2
N05679: length 3.8
  TOP w0.203: U1.30 16.71,37.31 R4.2
N06312: length 4.7
  TOP w0.203: C10.1 16.5,41.33 18.12,39.71 U1.27
N08810: length 17.9
  TOP w0.203: R11.1 C15.2 ; C15.2 33.74,31.14 Y2.2 ; C15.2 33.74,29.6 33.2,29.06 32.96,29.06 32.2,28.3 32.2,27.81 32.4,27.61 32.61,27.61 34.72,25.5 34.72,23.95 35.46,23.22 35.53,23.22 35.61,23.29 36.17,23.29 36.25,23.22 36.8,23.22 U3.9
N08902: length 9
  TOP w0.203: U3.10 35.89,26.63 36.26,27 36.43,27 36.97,27.54 C14.2 36.97,28.7 37.76,29.49 R11.2 37.33,30.2 37.33,31.86 Y2.1
N09327: length 6.3
  TOP w0.203: R6.2 32.36,39.37 30.3,37.31 U1.11
N09393: length 4.5
  TOP w0.203: U1.10 29.13,36.51 29.41,36.79 29.98,36.79 30.26,36.51 31.08,36.51 R7.2
N09409: length 3
  TOP w0.203: D3.1 36.02,39.12 35.79,39.34 34.66,39.34 R6.1
N09411: length 4.2
  TOP w0.203: D4.1 37.12,36.83 R7.1
N09469: length 41
  TOP w0.203: R8.2 64.68,39.78 v1(64.39,39.78) ; U1.9 v1(28.96,35.71)
  BOTTOM w0.203: v1(28.96,35.71) 29.12,35.71 29.41,35.41 29.98,35.41 30.27,35.71 40.12,35.71 40.2,35.79 60.4,35.79 62.71,38.1 62.79,38.1 63.2,38.5 63.2,38.58 v1(64.39,39.78)
N09481: length 33.7
  TOP w0.203: v1(26.24,27.71) 25.79,28.16 U1.8 ; R9.2 v1(50.27,27.51)
  BOTTOM w0.203: v1(26.24,27.71) 28.09,27.71 29.01,26.8 49.56,26.8 v1(50.27,27.51)
N12906: length 8.1
  TOP w0.203: R3.1 33.19,42.25 32.25,41.31 31.67,41.31 31.16,40.8 31.16,40.22 29.84,38.91 U1.13
N15968: length 6.9
  TOP w0.203: D2.2 3.12,10.24 J4.2
N19205: length 0.4
  TOP w0.203: 23.15,10.24 J6.3
N20833: length 49.2
  TOP w0.203: v1(20.9,7.52) 21.82,6.6 23.56,6.6 24.47,7.51 24.47,8.51 24.65,8.69 25.31,8.69 25.74,9.12 25.74,11.06 24.91,11.89 24.13,11.89 21.49,14.52 21.49,18.78 18.05,22.23 15.99,22.23 14.58,23.64 14.58,25 12.84,26.73 Q1.1 ; U4.4 34.99,7.52 v1(33.83,7.52)
  BOTTOM w0.203: v1(33.83,7.52) 29.88,7.52 29.72,7.67 29.15,7.67 29,7.52 v1(20.9,7.52)
N21024: length 66.7
  TOP w0.203: R12.2 44.18,5.77 42.17,7.78 ; 42.17,7.78 42.37,7.98 42.37,12.06 39.83,14.61 v1(38.02,14.61) ; 42.17,7.78 41.86,8.09 U4.3 ; R13.1 v1(1.46,26.76) ; v1(22.38,24.64) v1(22.38,14.61)
  BOTTOM w0.203: v1(1.46,26.76) 20.26,26.76 v1(22.38,24.64) ; v1(22.38,14.61) v1(38.02,14.61)
N21846: length 2.1
  TOP w0.203: R14.2 63.59,47.17 D6.2
N47345: length 3.9
  TOP w0.203: J5.1 11.32,35.92 L3.1

## Copper pours and planes (outline as drawn; the poured copper is in the pictures)
GND on TOP: 1.02,52.48 1.02,1.55 67.11,1.55 67.11,52.48
GND on BOTTOM: 66.9,52.32 66.9,1.7 1.14,1.7 1.14,52.32
